# Altium PCB main.PcbDoc (part 13 of 16)
Units mil, origin at the board's own origin, x right, y up, seen from the top; angles counter-clockwise.
Board outline 8394.75 x 5164.44 mil, 7 copper layers (Top Layer 1, Layer 2, Layer 3, Unused, Layer 4_pow, Layer 5_gnd, Bottom 6+gnd), stack 64.043 mil thick; 364 components, 409 nets, 1932 pads, 1061 vias.
Unrouted connection lines stored in the file: 2.
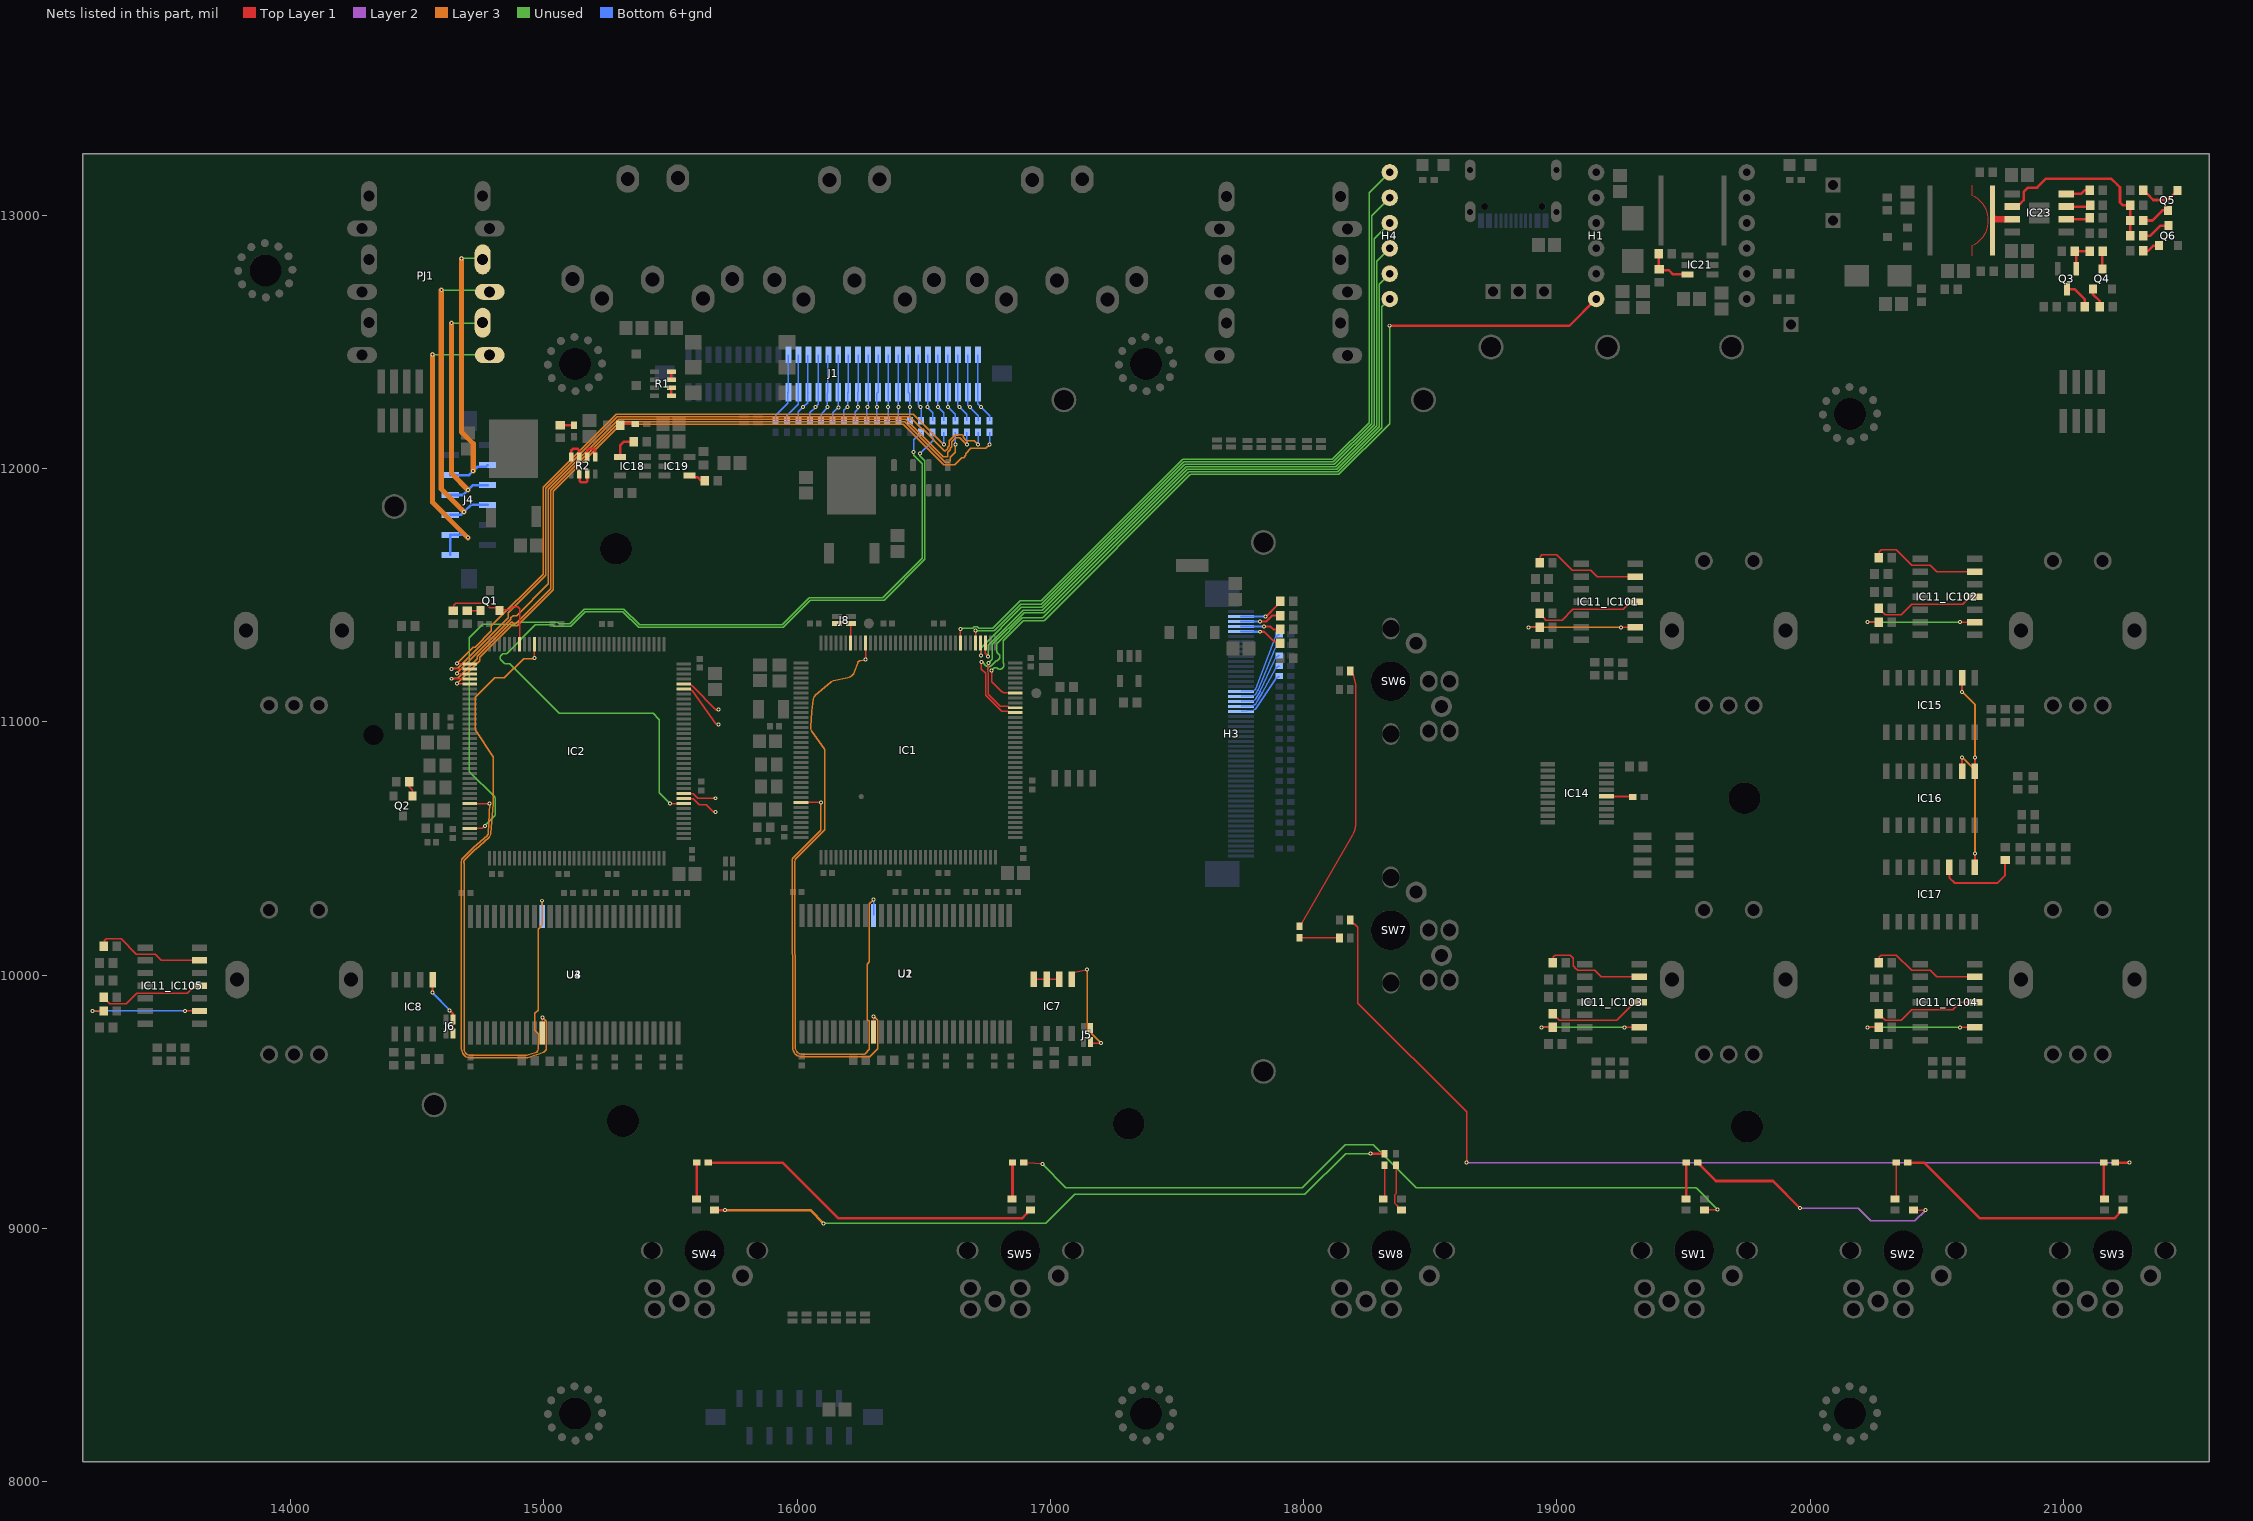
[diagram p16: the nets of this part, all layers, seen from the top]

## Via types
v1: diameter 15.75, hole 7.87, Top Layer 1 to Bottom 6+gnd, tented both sides, 961 vias
v2: diameter 27.56, hole 11.81, Top Layer 1 to Bottom 6+gnd, 45 vias
v3: diameter 23.62/23.62/23.62/23.62/23.62/23.62/23.62 (per signal layer), hole 12, Top Layer 1 to Bottom 6+gnd, tented top, 42 vias
v4: diameter 15.75, hole 7.87, Top Layer 1 to Bottom 6+gnd, 10 vias
v5: diameter 23.62/23.62/23.62/23.62/23.62/23.62/23.62 (per signal layer), hole 12, Top Layer 1 to Bottom 6+gnd, tented bottom, 3 vias

## Nets (pads, with @x,y where several pads share a name; then routed paths per layer and width w, separated by ;. In a path a pad name is that pad's centre, name@x,y a point inside that pad or via, vN(x,y) a via of type N, cw(c..) or ccw(c..) an arc to the next point about the centre after c; other vN are vias at no path point) (continued)
NetH3_30: H3.30 R67.1 | length 219.2
  Bottom 6+gnd w5: H3.30@17753.15,11041.93 17801.83,11045.34 17808.28,11049.33 ccw(c17804.33,11055.71) 17810.56,11051.53 17890.89,11171.3 R67.1@17903.15,11180.61
NetH3_31: H3.31 R68.1 | length 237.6
  Bottom 6+gnd w5: H3.31@17753.15,11061.61 17801.83,11065.02 17808.28,11069.02 ccw(c17804.33,11075.4) 17810.79,11071.59 17819.4,11086.19 17836.63,11115.4 ccw(c17804.33,11134.45) 17837.05,11116.12 17890.89,11212.61 R68.1@17903.15,11221.92
NetH3_32: H3.32 R69.1 | length 256.9
  Bottom 6+gnd w5: H3.32@17753.15,11081.3 17801.83,11084.71 17808.28,11088.7 ccw(c17804.33,11095.08) 17810.79,11091.27 17828.02,11120.48 ccw(c17804.33,11134.45) 17829.33,11122.98 17881.57,11236.86 cw(c17888.39,11233.74) 17881.81,11237.34 17890.89,11253.93 R69.1@17903.15,11263.24
NetH3_33: H3.33 R70.1 | length 276.6
  Bottom 6+gnd w5: H3.33@17753.15,11100.98 17801.83,11104.39 17808.28,11108.39 ccw(c17804.33,11114.77) 17810.79,11110.96 17819.4,11125.56 ccw(c17804.33,11134.45) 17820.55,11127.87 17881.44,11277.87 cw(c17888.39,11275.05) 17881.81,11278.65 17890.89,11295.25 R70.1@17903.15,11304.56
NetH3_34: H3.34 R71.1 | length 296.5
  Bottom 6+gnd w5: H3.34@17753.15,11120.67 17801.83,11124.08 17808.28,11128.07 ccw(c17804.33,11134.45) 17811.36,11131.82 17881.36,11319 cw(c17888.39,11316.37) 17881.81,11319.97 17890.89,11336.56 R71.1@17903.15,11345.87
NetH3_46: H3.46 R42.1 | length 174.4
  Top Layer 1 w8: v1(17827.99,11356.23) 17844.32,11356.23 17883.57,11316.98 17901.9,11316.98 R42.1@17908.57,11310.32
  Bottom 6+gnd w8: H3.46@17753.15,11356.89 17800.33,11356.23 v1(17827.99,11356.23)
NetH3_47: H3.47 R43.1 | length 160.7
  Top Layer 1 w8: v1(17844.02,11376.39) 17844.61,11376.98 17868.57,11376.98 17880.23,11365.32 R43.1@17908.57,11365.32
  Bottom 6+gnd w8: H3.47@17753.15,11376.57 17753.35,11376.78 17843.62,11376.78 v1(17844.02,11376.39)
NetH3_48: H3.48 R44.1 | length 165.4
  Top Layer 1 w8: v1(17828.57,11396.98) 17853.57,11396.98 17876.9,11420.32 R44.1@17908.57,11420.32
  Bottom 6+gnd w8: H3.48@17753.15,11396.26 17827.84,11396.26 v1(17828.57,11396.98)
NetH3_49: H3.49 R45.1 | length 182.9
  Top Layer 1 w8: v1(17848.57,11416.98) 17850.05,11418.47 17853.79,11418.47 17895.84,11460.51 17895.84,11464.25 R45.1@17908.57,11476.98
  Bottom 6+gnd w8: H3.49@17753.15,11415.94 17753.67,11416.46 17848.05,11416.46 v1(17848.57,11416.98)
NetIC1_138: IC1.138 J8.1 J8.3 | length 132.9
  Top Layer 1 w5: J8.3@16158.03,11388.82 J8.1@16213.15,11388.82 16211.77,11387.44 IC1.138@16211.77,11311.57
NetIC2_81: IC2.81 TP4.1 | length 147.8
  Top Layer 1 w5: IC2.81@15552.67,10697.62 15589.35,10697.62 15613.72,10673.24 15642.26,10673.24 15671.69,10643.82 v1(15678.15,10643.82)
NetIC2_82: IC2.82 TP3.1 | length 133.1
  Top Layer 1 w5: IC2.82@15552.67,10717.31 15589.66,10717.31 15608.15,10698.82 v1(15678.15,10698.82)
NetIC2_103: IC2.103 TP6.1 | length 206.6
  Top Layer 1 w5: IC2.103@15552.67,11130.69 15579.2,11127.29 15585.65,11123.29 cw(c15581.7,11116.91) 15587.82,11121.25 15678.15,10993.82 v1(15690.46,10989.49)
NetIC2_104: IC2.104 TP5.1 | length 178.7
  Top Layer 1 w5: IC2.104@15552.67,11150.38 15579.2,11146.97 15585.65,11142.97 cw(c15581.7,11136.6) 15587.06,11141.85 15678.15,11048.82 v1(15690.46,11048.51)
NetIC2_138: IC2.138 Q1.2 R109.1 | length 448.8
  Top Layer 1 w5: R109.1@14643.15,11438.82 14644.45,11440.12 14644.45,11460.12 14653.15,11468.82 14769.23,11468.82 14786.79,11451.26 14813.74,11451.26 Q1.2@14825.55,11439.45 14829.92,11443.82 14865.17,11443.82 14876.73,11455.37 14896.37,11455.37 14905.58,11446.17 14905.58,11309.43 IC2.138@14903.53,11307.38
NetIC7_1: IC7.1 J5.2 J5.4 | length 486.4
  Top Layer 1 w5: IC7.1@17085.24,9983.98 17095.53,10011.5 v1(17145.24,10022.2) ; J5.4@17157.8,9737.09 J5.2@17157.8,9792.2 ; J5.4@17164.02,9737.2 17169.02,9732.2 v1(17200.24,9732.2)
  Layer 3 w5: v1(17145.24,10022.2) 17145.24,9787.2 v1(17200.24,9732.2)
NetIC7_2: IC7.2 IC7.3 IC7.4 | length 100
  Top Layer 1 w5: IC7.4@16935.24,9983.98 IC7.2@17035.24,9983.98
NetIC8_1: IC8.1 J6.2 J6.4 | length 245.9
  Top Layer 1 w8: v1(14560.48,9931.26) 14560.48,9981.03 IC8.1@14561.48,9982.03 ; v1(14628.48,9861.26) 14641.48,9848.26 J6.2@14641.48,9825.26 J6.4@14641.48,9770.14
  Bottom 6+gnd w8: v1(14560.48,9931.26) 14560.48,9930.26 14628.48,9862.26 v1(14628.48,9861.26)
NetIC14_15: IC14.15 R76.2 | length 105.2
  Top Layer 1 w8: IC14.15@19195.67,10706.02 19196.77,10704.92 19298.9,10704.92 R76.2@19300,10703.82
NetIC15_10: IC15.10 IC16.9 | length 388.4
  Top Layer 1 w8: v1(20600,11119.25) IC15.10@20600,11173.82 ; IC16.9@20650,10806.1 v1(20650,10860.67)
  Layer 3 w8: v1(20600,11119.25) 20650,11069.25 v1(20650,10860.67)
NetIC16_10: IC16.10 IC17.9 | length 509.8
  Top Layer 1 w8: IC16.10@20600,10806.1 v1(20600,10860.67) ; IC17.9@20650,10426.1 v1(20650,10480.67)
  Layer 3 w8: v1(20600,10860.67) 20650,10810.67 v1(20650,10480.67)
NetIC17_11: IC17.11 R86.1 | length 341.8
  Top Layer 1 w8: IC17.11@20550,10426.1 20550,10385 20570,10365 20740,10365 20770,10395 R86.1@20770,10455
NetIC18_4: IC18.4 R102.1 | length 105
  Top Layer 1 w10: IC18.4@15301.2,12047.11 15301.2,12092.11 15316.2,12107.11 R102.1@15355.02,12107.11
NetIC19_4: IC19.4 R105.1 | length 69.9
  Top Layer 1 w10: IC19.4@15574.63,11972.31 15579.94,11966.99 15605.96,11966.99 15618.58,11954.37 15634.13,11954.37 R105.1@15636.2,11952.31
NetIC21_3: IC21.3 R17.1 R20.2 | length 182.3
  Top Layer 1 w10: R20.2@19402.28,12848.61 19402.28,12789.93 19407.8,12784.4 19441.75,12784.4 19459.15,12767 IC21.3@19516.38,12767
NetIC23_2: IC23.2 R52.1 | length 95.3
  Top Layer 1 w10: IC23.2@21011.42,12985 21099.65,12985 R52.1@21104.65,12990
NetIC23_3: IC23.3 R127.1 | length 95.3
  Top Layer 1 w10: IC23.3@21011.42,13035 21099.65,13035 R127.1@21104.65,13040
NetIC23_4: IC23.4 R128.2 | length 99.4
  Top Layer 1 w10: IC23.4@21011.42,13085 21069.65,13085 21084.65,13100 R128.2@21104.65,13100
NetIC23_6: IC23.6 R129.2 R130.2 R131.2 | length 729.6
  Top Layer 1 w10: IC23.6@20797.87,13035 20806.65,13043.78 20826.64,13043.78 20842.89,13060.03 20842.89,13093.25 20859.65,13110 20895.7,13110 20930.07,13144.38 21189.57,13144.38 21212.72,13121.22 21212.85,13121.22 21223.43,13110.65 21223.43,13051.22 21234.65,13040 R129.2@21264.65,13040 R130.2@21264.65,12980 R131.2@21264.65,12920
NetIC23_7: IC23.7 L2.1 | length 75.3
  Top Layer 1 w25: L2.1@20724.65,12990 20729.65,12985 IC23.7@20797.87,12985
NetJ1_1: J1.1 J1.2 R141.2 | length 279.2
  Bottom 6+gnd w5: J1.2@16713.7,12450 J1.1@16713.7,12302.36 16713.7,12256.3 v1(16726.81,12243.19) 16760,12210 R141.2@16760,12190
NetJ1_3: J1.3 J1.4 R142.2 | length 276.8
  Bottom 6+gnd w5: J1.4@16674.33,12450 J1.3@16674.33,12302.36 16674.33,12250.67 v1(16681.81,12243.19) 16715,12210 R142.2@16715,12190
NetJ1_5: J1.5 J1.6 R143.2 | length 274.5
  Bottom 6+gnd w5: J1.6@16634.96,12450 J1.5@16634.96,12302.36 16634.96,12250.04 v1(16641.81,12243.19) 16670,12215 R143.2@16670,12190
NetJ1_7: J1.7 J1.8 R144.2 | length 272.2
  Bottom 6+gnd w5: J1.8@16595.59,12450 J1.7@16595.59,12302.36 v1(16595.59,12244.41) 16625,12215 R144.2@16625,12190
NetJ1_9: J1.9 J1.10 R145.2 | length 269.8
  Bottom 6+gnd w5: J1.10@16556.22,12450 J1.9@16556.22,12302.36 v1(16556.22,12243.78) 16580,12220 R145.2@16580,12190
NetJ1_11: J1.11 J1.12 R146.2 | length 269.1
  Bottom 6+gnd w5: J1.12@16516.85,12450 J1.11@16516.85,12302.36 16515,12300.51 v1(16515,12243.19) 16515,12240 16535,12220 R146.2@16535,12190
NetJ1_13: J1.13 J1.14 R147.2 | length 265.2
  Bottom 6+gnd w5: J1.14@16477.48,12450 J1.13@16477.48,12302.36 16477.48,12252.52 v1(16486.81,12243.19) 16490,12240 R147.2@16490,12190
NetJ1_15: J1.15 J1.16 R148.2 | length 262.9
  Bottom 6+gnd w5: J1.16@16438.11,12450 J1.15@16438.11,12302.36 16445,12295.47 v1(16445,12243.19) R148.2@16445,12190
NetJ1_17: J1.17 J1.18 R149.2 | length 260.5
  Bottom 6+gnd w5: J1.18@16398.74,12450 J1.17@16398.74,12302.36 16400,12301.1 v1(16400,12243.19) R149.2@16400,12190
NetJ1_19: J1.19 J1.20 R150.2 | length 261.8
  Bottom 6+gnd w5: R150.2@16355,12190 16359.37,12194.37 v1(16359.37,12243.19) J1.19@16359.37,12302.36 J1.20@16359.37,12450
NetJ1_21: J1.21 J1.22 R151.2 | length 262.1
  Bottom 6+gnd w5: R151.2@16315,12190 v1(16315,12243.19) 16315,12297.36 J1.21@16320,12302.36 J1.22@16320,12450
NetJ1_23: J1.23 J1.24 R152.2 | length 262.3
  Bottom 6+gnd w5: R152.2@16275,12190 16275,12240 v1(16278.19,12243.19) 16280,12245 16280,12301.73 J1.23@16280.63,12302.36 J1.24@16280.63,12450
NetJ1_25: J1.25 J1.26 R153.2 | length 264.7
  Bottom 6+gnd w5: R153.2@16230,12190 16230,12225 16240,12235 v1(16240,12243.19) 16240,12301.1 J1.25@16241.26,12302.36 J1.26@16241.26,12450
NetJ1_27: J1.27 J1.28 R154.2 | length 267
  Bottom 6+gnd w5: R154.2@16185,12190 16185,12230 v1(16198.19,12243.19) 16200,12245 16200,12300.47 J1.27@16201.89,12302.36 J1.28@16201.89,12450
NetJ1_29: J1.29 J1.30 R155.2 | length 269.3
  Bottom 6+gnd w5: R155.2@16140,12190 16140,12220 v1(16162.52,12242.52) J1.29@16162.52,12302.36 J1.30@16162.52,12450
NetJ1_31: J1.31@16123.15,12302.36 J1.32@16123.15,12450 R156.2 | length 271.7
  Bottom 6+gnd w5: R156.2@16095,12190 16095,12215 16120,12240 v1(16120,12243.19) 16120,12299.21 J1.31@16123.15,12302.36 ; J1.31@16121.57,12300.79 J1.32@16121.57,12448.43
NetJ1_33: J1.33 J1.34 R157.2 | length 274
  Bottom 6+gnd w5: R157.2@16050,12190 16050,12220 v1(16073.19,12243.19) 16083.78,12253.78 J1.33@16083.78,12302.36 J1.34@16083.78,12450
NetJ1_35: J1.35 J1.36 R158.2 | length 276.3
  Bottom 6+gnd w5: R158.2@16005,12190 16005,12225 v1(16023.19,12243.19) 16041.37,12261.37 16041.37,12299.33 J1.35@16044.41,12302.36 ; J1.35@16042.89,12300.84 J1.36@16042.89,12448.48
NetJ1_37: J1.37 J1.38 R159.2 | length 278.7
  Bottom 6+gnd w5: R159.2@15960,12190 15960,12210 16005.04,12255.04 J1.37@16005.04,12302.36 J1.38@16005.04,12450
NetJ1_39: J1.39 J1.40 R160.2 | length 281
  Bottom 6+gnd w5: R160.2@15915,12190 15915,12210.53 15963.4,12258.93 15963.4,12300.09 J1.39@15965.67,12302.36 J1.40@15965.67,12450
NetQ1_1: Q1.1 R106.2 | length 52.9
  Top Layer 1 w5: R106.2@14698.15,11438.82 14750.12,11438.82 Q1.1@14750.75,11439.45
NetQ2_1: Q2.1 R107.2 | length 66.7
  Top Layer 1 w5: R107.2@14465.79,10768.82 14465.79,10746.18 14480.55,10731.42 Q2.1@14480.55,10708.19
NetQ3_1: Q3.1 R21.1 R38.2 | length 132.5
  Top Layer 1 w10: Q3.1@21050.02,12789.37 21050.02,12853.37 R21.1@21044.02,12859.37 R38.2@21104.02,12859.37
NetQ3_3: Q3.3 R39.2 | length 116.6
  Top Layer 1 w10: Q3.3@21014.02,12709.37 21044.02,12709.37 21084.02,12669.37 R39.2@21084.02,12639.37
NetQ4_1: Q4.1 R50.1 | length 82
  Top Layer 1 w10: Q4.1@21116.61,12710 21116.61,12688.55 21144.02,12661.15 R50.1@21144.02,12639.37
NetQ4_3: Q4.3 R38.1 | length 71.1
  Top Layer 1 w10: Q4.3@21154.02,12788.74 21154.02,12858.19 R38.1@21155.2,12859.37
NetQ5_1: Q5.1 R133.2 | length 170.3
  Top Layer 1 w10: R133.2@21315.83,13100 21315.83,13098.03 21327.56,13086.3 21329.3,13086.3 21354.63,13060.97 21414.27,13060.97 21439.33,13086.02 21441.3,13086.02 21452.05,13096.77 Q5.1@21452.05,13098.74
NetQ5_3: Q5.3 R130.1 | length 115.4
  Top Layer 1 w10: R130.1@21315.83,12980 21350.97,12980 21390.97,13020 Q5.3@21414.65,13020
NetQ6_1: Q6.1 R134.2 | length 71.4
  Top Layer 1 w10: R134.2@21314.65,12860 21334.65,12860 21355.91,12881.26 Q6.1@21377.24,12881.26
NetQ6_3: Q6.3 R131.1 | length 115.4
  Top Layer 1 w10: R131.1@21315.83,12920 21343.71,12920 21383.71,12960 Q6.3@21414.65,12960
NetR1_1: R1.1 R1.2 | length 31.5
  Top Layer 1 w10: R1.1@15503.46,12287.76 R1.2@15503.46,12319.25
NetR1_3: R1.3 R1.4 | length 31.5
  Top Layer 1 w10: R1.3@15503.46,12350.75 R1.4@15503.46,12382.24
NetR2_2: R2.2 R2.3 | length 89.9
  Top Layer 1 w10: R2.2@15140.45,11978.65 15141.2,11977.9 15141.2,11951.64 15147.06,11945.78 15166.09,11945.78 15171.95,11951.64 R2.3@15171.95,11978.65
NetR2_5: R2.5 R2.6 | length 89.9
  Top Layer 1 w10: R2.6@15171.95,12045.57 15171.95,12072.58 15177.81,12078.44 15196.84,12078.44 15202.7,12072.58 15202.7,12046.32 R2.5@15203.45,12045.57
NetR2_7: R2.7 R2.8 | length 89.9
  Top Layer 1 w10: R2.8@15108.96,12045.57 15108.96,12072.58 15114.82,12078.44 15133.85,12078.44 15139.71,12072.58 15139.71,12046.32 R2.7@15140.45,12045.57
NetR3_1: R3.1 SW8.3 | length 191.2
  Top Layer 1 w6: R3.1@18365,9250 18365,9138.2 18360.7,9133.9 18360.7,9099.22 18371.7,9088.22 18371.7,9084.28 18382.48,9073.5 SW8.3@18386.42,9073.5
NetR4_1: R4.1 SW5.3 | length 1380.1
  Top Layer 1 w10: R4.1@15648.42,9260 15943.15,9260 16163.15,9040 16887.67,9040 16905.96,9058.28 16905.96,9062.22 16917.24,9073.5 SW5.3@16921.17,9073.5
NetR4_2: R4.2 SW4.1 | length 143.5
  Top Layer 1 w10: SW4.1@15602.44,9116.81 15603.15,9117.52 R4.2@15603.15,9260
NetR8_1: R8.1 SW4.3 | length 2800
  Top Layer 1 w5: SW4.3@15659.28,9062.09 15659.28,9062.22 15669.59,9072.54 SW4.3@15675.46,9072.54
  Top Layer 1 w10: SW4.3@15675.46,9072.54 v1(15715,9072.54) ; v1(18265,9295.28) R8.1@18320,9295.28
  Unused w5: v1(16105,9020) 16977.93,9020 ccw(c16977.93,9025) 16981.45,9021.45 17093.55,9133.55 cw(c17097.07,9130) 17097.07,9135 18002.93,9135 ccw(c18002.93,9140) 18006.45,9136.45 18163.83,9293.83 cw(c18167.35,9290.28) 18167.35,9295.28 v1(18265,9295.28)
  Layer 3 w10: v1(15715,9072.54) 16052.46,9072.54 v1(16105,9020)
NetR8_2: R8.2 SW8.1 | length 135.5
  Top Layer 1 w5: SW8.1@18314.37,9116.81 18320,9122.44 R8.2@18320,9250
NetR72_1: R72.1 SW1.3 | length 3006.8
  Top Layer 1 w5: R72.1@16895.79,9260 16908.05,9259.15 v1(16968.15,9255) ; SW1.3@19582.58,9073.5 19597.79,9073.94 v1(19635,9075)
  Unused w5: v1(16968.15,9255) 17061.7,9161.45 ccw(c17065.22,9165) 17065.22,9160 17995,9160 18165,9330 18275,9330 18445,9160 19547.93,9160 cw(c19547.93,9155) 19551.46,9158.54 v1(19635,9075)
NetR72_2: R72.2 SW5.1 | length 143.8
  Top Layer 1 w10: SW5.1@16849.12,9116.81 16850.51,9118.2 R72.2@16850.51,9260
NetR73_1: R73.1 SW2.3 | length 1064
  Top Layer 1 w5: SW2.3@20407.69,9073.5 20408.16,9073.03 v1(20455.95,9073.03)
  Top Layer 1 w10: R73.1@19555.28,9260 19558.23,9260 19565.04,9253.19 19565.04,9250.24 19627.78,9187.5 19852.5,9187.5 v1(19960,9080)
  Layer 2 w5: v1(19960,9080) 20190,9080 20240,9030 20412.92,9030 v1(20455.95,9073.03)
NetR73_2: R73.2 SW1.1 | length 143.4
  Top Layer 1 w10: R73.2@19510,9260 19510,9117.34 SW1.1@19510.53,9116.81
NetR74_1: R74.1 SW3.3 | length 956.5
  Top Layer 1 w10: R74.1@20385.28,9260 20450,9260 20670,9040 21200.96,9040 21219.24,9058.28 21219.24,9062.22 21230.52,9073.5 SW3.3@21234.46,9073.5
NetR74_2: R74.2 SW2.1 | length 145
  Top Layer 1 w5: SW2.1@20335.64,9116.81 20340,9121.17 R74.2@20340,9260
NetR75_1: R75.1 SW7.3 | length 3822.2
  Top Layer 1 w5: SW7.3@18184.11,10218.18 18184.11,10214.24 18195.39,10202.97 18199.32,10202.97 18213.15,10189.14 18213.15,9890 18643.15,9460 v1(18643.15,9260)
  Top Layer 1 w10: R75.1@21205.28,9260 v1(21260,9260)
  Layer 2 w5: v1(18643.15,9260) v1(21260,9260)
NetR75_2: R75.2 SW3.1 | length 144.2
  Top Layer 1 w10: R75.2@21160,9260 21160,9119.22 SW3.1@21162.41,9116.81
NetR77_1: R77.1 SW6.3 | length 1072
  Top Layer 1 w5: R77.1@17983.15,10192.64 17992.46,10204.9 18193.23,10554.69 ccw(c18110.55,10602.23) 18205.92,10602.32 18205.39,11146.45 ccw(c18197.89,11146.44) 18205.14,11148.34 18195.39,11185.56 SW6.3@18184.11,11200.77
NetR77_2: R77.2 SW7.1 | length 158.2
  Top Layer 1 w5: R77.2@17983.15,10147.36 18139.57,10147.36 SW7.1@18140.8,10146.13
NetR103_2: R103.2 R104.1 | length 61.8
  Top Layer 1 w10: R103.2@15301.2,12172.11 15306.2,12177.11 R104.1@15360.93,12177.11
NetR139_2: R139.2 R140.1 | length 55.3
  Top Layer 1 w10: R139.2@15065,12172.48 15065.67,12171.81 R140.1@15120,12171.81
O\0\_IC101: IC11_IC101.2 R48_IC101.1 | length 466.1
  Top Layer 1 w5: v4(18887.72,11373.82) R48_IC101.1@18931.53,11373.82 ; v4(19252.72,11373.82) IC11_IC101.2@19310,11373.82
  Layer 3 w5: v4(18887.72,11373.82) v4(19252.72,11373.82)
O\0\_IC102: IC11_IC102.2 R48_IC102.1 | length 466.1
  Top Layer 1 w5: v4(20227.28,11393.82) R48_IC102.1@20271.1,11393.82 ; v4(20592.28,11393.82) IC11_IC102.2@20649.57,11393.82
  Unused w5: v4(20227.28,11393.82) v4(20592.28,11393.82)
O\0\_IC103: IC11_IC103.2 R48_IC103.1 | length 428.8
  Top Layer 1 w5: v4(18940,9793.82) R48_IC103.1@18983.82,9793.82 ; v4(19267.72,9793.82) IC11_IC103.2@19325,9793.82
  Unused w5: v4(18940,9793.82) v4(19267.72,9793.82)
O\0\_IC104: IC11_IC104.2 R48_IC104.1 | length 466.1
  Top Layer 1 w5: v4(20227.28,9793.82) R48_IC104.1@20271.1,9793.82 ; v4(20592.28,9793.82) IC11_IC104.2@20649.57,9793.82
  Unused w5: v4(20227.28,9793.82) v4(20592.28,9793.82)
O\0\_IC105: IC11_IC105.2 R48_IC105.1 | length 466.1
  Top Layer 1 w5: v4(13218.15,9858.82) R48_IC105.1@13261.97,9858.82 ; v4(13583.15,9858.82) IC11_IC105.2@13640.43,9858.82
  Bottom 6+gnd w5: v4(13218.15,9858.82) v4(13583.15,9858.82)
O\1\_IC101: IC11_IC101.4 R47_IC101.1 | length 420
  Top Layer 1 w5: R47_IC101.1@18931.53,11428.82 18931.53,11426.85 18945.77,11412.62 18946.52,11412.62 18956.52,11402.62 19020.32,11402.62 19061.81,11444.11 19262.58,11444.11 19292.28,11473.82 IC11_IC101.4@19310,11473.82
O\1\_IC102: IC11_IC102.4 R47_IC102.1 | length 420
  Top Layer 1 w5: R47_IC102.1@20271.1,11448.82 20271.1,11446.85 20285.33,11432.62 20286.09,11432.62 20296.09,11422.62 20359.89,11422.62 20401.38,11464.11 20602.15,11464.11 20631.85,11493.82 IC11_IC102.4@20649.57,11493.82
O\1\_IC103: IC11_IC103.4 R47_IC103.1 | length 382.7
  Top Layer 1 w5: R47_IC103.1@18983.82,9848.82 18983.82,9846.85 18998.05,9832.62 18998.8,9832.62 19008.8,9822.62 19236.08,9822.62 19307.28,9893.82 IC11_IC103.4@19325,9893.82
O\1\_IC104: IC11_IC104.4 R47_IC104.1 | length 420
  Top Layer 1 w5: R47_IC104.1@20271.1,9848.82 20271.1,9846.85 20285.33,9832.62 20286.09,9832.62 20296.09,9822.62 20359.89,9822.62 20401.38,9864.11 20562.58,9864.11 20592.28,9893.82 IC11_IC104.4@20649.57,9893.82
O\1\_IC105: IC11_IC105.4 R47_IC105.1 | length 420
  Top Layer 1 w5: R47_IC105.1@13261.97,9913.82 13261.97,9911.85 13276.2,9897.62 13276.95,9897.62 13286.95,9887.62 13350.75,9887.62 13392.25,9929.11 13593.01,9929.11 13622.72,9958.82 IC11_IC105.4@13640.43,9958.82
O\2\_IC101: IC11_IC101.6 R49_IC101.1 | length 439.3
  Top Layer 1 w5: R49_IC101.1@18931.53,11628.82 18933.56,11630.84 18933.56,11652.09 18941.15,11659.68 19000.28,11659.68 19061.14,11598.82 19134.48,11598.82 19159.48,11573.82 IC11_IC101.6@19310,11573.82
O\2\_IC102: IC11_IC102.6 R49_IC102.1 | length 439.3
  Top Layer 1 w5: R49_IC102.1@20271.1,11648.82 20273.13,11650.84 20273.13,11672.09 20280.72,11679.68 20339.85,11679.68 20400.71,11618.82 20474.05,11618.82 20499.05,11593.82 IC11_IC102.6@20649.57,11593.82
O\2\_IC103: IC11_IC103.6 R49_IC103.1 | length 420.7
  Top Layer 1 w5: R49_IC103.1@18983.82,10048.82 18985.84,10050.84 18985.84,10072.09 18993.43,10079.68 19052.56,10079.68 19065,10067.25 19065,10036.75 19070.91,10030.84 19070.91,10029.43 19081.52,10018.82 19149.48,10018.82 19174.48,9993.82 IC11_IC103.6@19325,9993.82
O\2\_IC104: IC11_IC104.6 R49_IC104.1 | length 439.3
  Top Layer 1 w5: R49_IC104.1@20271.1,10048.82 20273.13,10050.84 20273.13,10072.09 20280.72,10079.68 20339.85,10079.68 20400.71,10018.82 20474.05,10018.82 20499.05,9993.82 IC11_IC104.6@20649.57,9993.82
O\2\_IC105: IC11_IC105.6 R49_IC105.1 | length 439.3
  Top Layer 1 w5: R49_IC105.1@13261.97,10113.82 13263.99,10115.84 13263.99,10137.09 13271.58,10144.68 13330.71,10144.68 13391.58,10083.82 13464.91,10083.82 13489.91,10058.82 IC11_IC105.6@13640.43,10058.82
PH_LOUT1_11: J4.1 J4.3 PJ1.26 | length 1160.5
  Unused w5: v1(14560,12450) 14782.76,12450 cw(c14782.76,12445) PJ1.26@14786.24,12448.59
  Layer 3 w20: v1(14560,12450) 14560,11867.48 v1(14700,11727.48)
  Bottom 6+gnd w10: J4.1@14630,11660 J4.3@14630,11738.74 14688.74,11738.74 v1(14700,11727.48)
PH_LOUT2_11: J4.7 J4.8 PJ1.6 | length 974.4
  Unused w5: v1(14635,12575) 14755.11,12575 ccw(c14755.11,12580) PJ1.6@14758.68,12576.5
  Layer 3 w20: v1(14635,12575) 14635,11981.81 v1(14700.91,11915.91)
  Bottom 6+gnd w10: J4.7@14630,11896.22 14681.22,11896.22 v1(14700.91,11915.91) 14720.59,11935.59 J4.8@14777.64,11935.59
PH_ROUT1_11: J4.5 J4.6 PJ1.24 | length 1269.9
  Unused w5: v1(14595,12705) 14777.76,12705 cw(c14777.76,12700) 14781.29,12703.54 PJ1.24@14786.24,12698.59
  Layer 3 w20: v1(14595,12705) 14595,11920 v1(14685,11830)
  Bottom 6+gnd w10: J4.5@14630,11817.48 14631.11,11818.59 14673.59,11818.59 v1(14685,11830) 14711.85,11856.85 J4.6@14777.64,11856.85
PH_ROUT2_11: J4.9 J4.10 PJ1.4 | length 1106.8
  Unused w5: v1(14675,12830) 14753.11,12830 cw(c14753.11,12825) 14756.65,12828.54 PJ1.4@14758.68,12826.5
  Layer 3 w20: v1(14675,12830) 14675,12145 14721.24,12098.76 v1(14721.24,11991.24)
  Bottom 6+gnd w10: J4.9@14630,11974.96 14704.96,11974.96 v1(14721.24,11991.24) 14737.52,12007.52 14770.83,12007.52 J4.10@14777.64,12014.33
SAI1_FS: IC2.3 R143.1 | length 2880.9
  Top Layer 1 w5: v1(14656.48,11190.89) 14657.05,11190.32 14706.58,11190.32 IC2.3@14707.15,11189.75
  Layer 3 w5: v1(14656.48,11190.89) 14656.48,11193.19 14813.26,11349.97 ; 14813.83,11350.54 14869.63,11406.34 14869.63,11411.37 14878.63,11420.37 14892.12,11420.37 15017.83,11546.08 15017.83,11918.63 15294.97,12195.77 16429.23,12195.77 16577.52,12047.48 16593.86,12047.48 16593.86,12064.16 16605,12075.3 16605,12080.86 16610,12085.86 16610,12105.86 16626.5,12122.36 16642.5,12122.36 16669.86,12095 v1(16670,12095)
  Bottom 6+gnd w5: v1(16670,12095) R143.1@16670,12144.72
SAI1_MCLK: IC2.1 R145.1 | length 2695.2
  Top Layer 1 w5: v1(14656.48,11230.26) 14657.05,11229.69 14706.58,11229.69 IC2.1@14707.15,11229.12
  Layer 3 w5: v1(14656.48,11230.26) 14722.08,11295.85 14729.72,11295.85 14793.26,11359.39 14793.26,11379.14 14997.83,11583.71 14997.83,11926.92 15286.68,12215.77 16459.23,12215.77 v1(16580,12095)
  Bottom 6+gnd w5: v1(16580,12095) R145.1@16580,12144.72
SAI1_SCK: IC2.4 R144.1 | length 2892.8
  Top Layer 1 w5: v1(14634.67,11170.65) 14634.96,11170.35 14706.86,11170.35 IC2.4@14707.15,11170.06
  Layer 3 w5: v1(14634.67,11170.65) 14636.73,11172.71 14660.04,11172.71 14736.63,11249.29 14736.63,11259.2 14823.26,11345.83 ; 14823.83,11346.4 14872.84,11395.41 14878.63,11389.63 14891.37,11389.63 15027.83,11526.08 15027.83,11914.49 15299.11,12185.77 16424.23,12185.77 16584.4,12025.6 16602.07,12025.6 16605,12028.53 16605,12045 16625.37,12065.37 v1@16625.37,12094.63
  Bottom 6+gnd w5: R144.1@16625,12144.72 16625,12095.37 v1(16625.37,12095)
SAI1_SD_A: IC2.5 R141.1 | length 2968.3
  Top Layer 1 w5: v1(14656.48,11151.52) 14657.05,11150.95 14706.58,11150.95 IC2.5@14707.15,11150.38
  Layer 3 w5: v1(14656.48,11151.52) 14746.63,11241.66 14746.63,11255.05 14833.26,11341.69 ; 14833.83,11342.26 14872.84,11381.27 14874.49,11379.63 14895.51,11379.63 15037.83,11521.94 15037.83,11910.35 15303.25,12175.77 16419.83,12175.77 16580,12015.6 16622.17,12015.6 16649.98,12043.41 16657.58,12043.41 16666.59,12052.42 16666.59,12060.02 16686.57,12080 16745,12080 v1(16760,12095)
  Bottom 6+gnd w5: v1(16760,12095) R141.1@16760,12144.72
SAI1_SD_B: IC2.2 R142.1 | length 2947.9
  Top Layer 1 w5: v1(14634.67,11210.02) 14634.96,11209.72 14706.86,11209.72 IC2.2@14707.15,11209.43
  Layer 3 w5: v1(14634.67,11210.02) 14636.73,11212.08 14660.08,11212.08 14803.26,11355.25 14859.63,11411.62 14859.63,11431.37 15007.83,11579.57 15007.83,11922.78 15290.82,12205.77 16444.23,12205.77 16495,12155 16497.16,12155 16583.86,12068.3 16595,12079.44 16595,12085 16600,12090 16600,12110 16624.65,12134.65 16652.42,12134.65 16655.35,12131.72 16655.35,12123.65 16668.63,12110.37 16699.63,12110.37 16714.63,12095.37 v1(16715,12095.37)
  Bottom 6+gnd w5: v1(16715,12095.37) R142.1@16715,12144.72
SAI2_SD_A: IC2.80 R146.1 | length 3558.7
  Top Layer 1 w5: v1(15498.15,10678.82) 15499.03,10677.94 IC2.80@15552.67,10677.94
  Unused w5: v1(15498.15,10678.82) 15456.45,10720.52 cw(c15460,10724.04) 15455,10724.04 15455,11007.93 ccw(c15450,11007.93) 15453.55,11011.45 15431.45,11033.55 ccw(c15427.93,11030) 15427.93,11035 15062.07,11035 cw(c15062.07,11040) 15058.55,11036.45 14865.84,11229.16 ccw(c14862.32,11225.61) 14862.32,11230.61 14847.68,11230.61 cw(c14847.68,11235.61) 14844.16,11232.06 14829.91,11246.31 cw(c14833.46,11249.83) 14828.46,11249.83 14828.46,11257.91 cw(c14833.46,11257.91) 14829.93,11261.45 14837.03,11268.55 cw(c14840.55,11265) 14840.55,11270 14851.08,11270 ccw(c14851.08,11275) 14854.6,11271.45 14966.27,11383.12 cw(c14969.79,11379.57) 14969.79,11384.57 15031.32,11384.57 cw(c15031.32,11379.57) 15034.84,11383.12 15039.34,11378.62 ccw(c15042.84,11382.19) 15042.84,11377.19 15102.41,11377.19 ccw(c15102.41,11382.19) 15105.93,11378.64 15160.84,11433.55 cw(c15164.36,11430) 15164.36,11435 15310.22,11435 cw(c15310.22,11430) 15313.74,11433.55 15372.02,11375.27 ccw(c15375.54,11378.82) 15375.54,11373.82 15944.04,11373.82 ccw(c15944.04,11378.82) 15947.56,11375.27 16050.84,11478.55 cw(c16054.36,11475) 16054.36,11480 16339.65,11480 ccw(c16339.65,11485) 16343.17,11481.45 16503.55,11641.83 ccw(c16500,11645.35) 16505,11645.35 16505,12027.73 ccw(c16500,12027.73) 16503.56,12031.25 16486.45,12048.55 cw(c16490,12052.07) 16485,12052.07 v1(16485,12060)
  Bottom 6+gnd w5: v1(16485,12060) 16535,12110 R146.1@16535,12144.72
SAI2_SD_B: IC2.34 R147.1 | length 3363.6
  Top Layer 1 w5: IC2.34@14707.15,10579.51 14756.54,10579.51 14766.85,10589.82 v1(14766.85,10590.1)
  Unused w5: v1(14766.85,10590.1) 14805.74,10628.99 ccw(c14802.19,10632.51) 14807.19,10632.51 14807.19,10700.77 ccw(c14802.19,10700.77) 14805.74,10704.29 14706.45,10803.58 cw(c14710,10807.1) 14705,10807.1 14705,11329.41 cw(c14710,11329.41) 14706.45,11332.93 14758.74,11385.22 cw(c14762.26,11381.67) 14762.26,11386.67 14886.34,11386.67 ccw(c14886.34,11391.67) 14889.86,11388.12 14894.86,11393.12 cw(c14898.38,11389.57) 14898.38,11394.57 15052.19,11394.57 cw(c15052.19,11389.57) 15055.71,11393.12 15060.2,11388.62 ccw(c15063.71,11392.19) 15063.71,11387.19 15098.27,11387.19 ccw(c15098.27,11392.19) 15101.79,11388.64 15156.7,11443.55 cw(c15160.22,11440) 15160.22,11445 15314.36,11445 cw(c15314.36,11440) 15317.88,11443.55 15376.16,11385.27 ccw(c15379.69,11388.82) 15379.69,11383.82 15939.9,11383.82 ccw(c15939.9,11388.82) 15943.42,11385.27 16046.7,11488.55 cw(c16050.22,11485) 16050.22,11490 16335.51,11490 ccw(c16335.51,11495) 16339.03,11491.45 16493.55,11645.97 ccw(c16490,11649.49) 16495,11649.49 16495,12016.06 ccw(c16490,12016.06) 16493.55,12019.58 16462.84,12050.29 cw(c16466.39,12053.82) 16461.41,12053.33 v1(16460.12,12066.62)
  Bottom 6+gnd w5: v1(16460.12,12066.62) 16460.12,12114.84 16477.74,12132.46 16480.69,12132.46 16490,12141.77 R147.1@16490,12144.72
SD_CK: H4.5 IC1.113 | length 2872
  Top Layer 1 w5: IC1.113@16703.9,11311.57 16704.57,11312.24 16704.57,11359.67 v1(16705.24,11360.34)
  Unused w5: v1(16705.24,11360.34) 16776.07,11360.34 ccw(c16776.07,11365.34) 16779.59,11361.79 16880.84,11463.05 cw(c16884.36,11459.5) 16884.36,11464.5 16962.07,11464.5 ccw(c16962.07,11469.5) 16965.59,11465.94 17525.35,12025.7 cw(c17528.87,12022.15) 17528.87,12027.15 18117.65,12027.15 18268.69,12178.19 18268.69,12998.68 H4.5@18340,13070
SD_CMD: H4.6 IC1.116 | length 3030.2
  Top Layer 1 w5: IC1.116@16644.84,11311.57 16645.04,11311.77 16645.04,11366.99 v1(16645.26,11367.21)
  Unused w5: v1(16645.26,11367.21) 16645.87,11367.82 cw(c16649.39,11364.27) 16649.27,11369.27 16691.17,11370 ccw(c16691.08,11375) 16694.6,11371.45 16697.42,11374.27 cw(c16700.94,11370.71) 16700.94,11375.71 16709.53,11375.71 cw(c16709.53,11370.71) 16713.05,11374.27 16715.53,11371.79 ccw(c16719.05,11375.34) 16719.05,11370.34 16771.42,11370.34 ccw(c16771.42,11375.34) 16774.94,11371.79 16881.14,11478 cw(c16884.67,11474.44) 16884.67,11479.44 16962.87,11479.44 ccw(c16962.87,11484.44) 16966.39,11480.89 17521.2,12035.7 cw(c17524.72,12032.15) 17524.72,12037.15 18111.44,12037.15 ccw(c18111.44,12042.15) 18114.96,12038.6 18258.69,12182.33 18258.69,13088.69 H4.6@18340,13170
SD_D0: H4.1 IC1.98 | length 2831.4
  Top Layer 1 w5: v1(16728.42,11236.65) 16727.25,11235.49 16727.25,11208.83 16744.17,11191.91 16744.17,11105.83 16807.26,11042.74 16831.5,11042.74 16837.78,11036.46 IC1.98@16860.91,11036.46
  Unused w5: v1(16728.42,11236.65) 16729.31,11236.65 cw(c16729.31,11231.65) 16732.85,11235.19 16745.33,11222.71 ccw(c16756.18,11233.59) 16750.86,11219.17 16752.6,11218.53 ccw(c16754.33,11223.22) 16754.33,11218.22 16758.77,11218.22 ccw(c16758.77,11223.22) 16761.12,11218.81 16763.4,11220.02 ccw(c16756.18,11233.59) 16767.04,11222.71 16784.71,11240.38 cw(c16788.23,11236.83) 16788.23,11241.83 16789.53,11241.83 ccw(c16789.53,11246.83) 16793.05,11243.28 16799.16,11249.39 ccw(c16795.61,11252.91) 16800.61,11252.91 16800.61,11261.5 ccw(c16795.61,11261.5) 16799.17,11265.01 16790.57,11273.61 cw(c16794.12,11277.13) 16789.12,11277.13 16789.12,11308.04 cw(c16794.12,11308.04) 16790.57,11311.56 16889.63,11410.62 cw(c16893.15,11407.07) 16893.15,11412.07 16968.43,11412.07 ccw(c16968.43,11417.07) 16971.95,11413.52 17544.13,11985.7 cw(c17547.65,11982.15) 17547.65,11987.15 18134.22,11987.15 18308.69,12161.62 18308.69,12638.68 H4.1@18340,12670
SD_D1: H4.2 IC1.99 | length 2837.4
  Top Layer 1 w5: v1(16756.18,11233.59) 16755.33,11232.74 16755.33,11212.74 16752.78,11210.19 16752.78,11197.45 16755.33,11194.9 16755.33,11108.81 16801.72,11062.42 16831.5,11062.42 16837.78,11056.14 IC1.99@16860.91,11056.14
  Unused w5: v1(16756.18,11233.59) 16768.41,11245.82 ccw(c16764.86,11249.34) 16769.86,11249.34 16769.86,11302.93 cw(c16774.86,11302.93) 16771.31,11306.45 16894.2,11429.33 cw(c16897.72,11425.78) 16897.72,11430.78 16970.78,11430.78 ccw(c16970.78,11435.78) 16974.3,11432.23 17537.77,11995.7 cw(c17541.29,11992.15) 17541.29,11997.15 18130.08,11997.15 18298.69,12165.76 18298.69,12728.68 H4.2@18340,12770
SD_D2: H4.3 IC1.111 | length 2714.9
  Top Layer 1 w5: IC1.111@16743.27,11311.57 16743.27,11270.42 v1(16754.4,11259.28)
  Unused w5: v1(16754.4,11259.28) 16754.4,11301.61 cw(c16759.4,11301.61) 16755.85,11305.13 16890.49,11439.76 cw(c16894.01,11436.21) 16894.01,11441.21 16967.07,11441.21 ccw(c16967.07,11446.21) 16970.59,11442.66 17533.63,12005.7 cw(c17537.15,12002.15) 17537.15,12007.15 18125.94,12007.15 18288.69,12169.91 18288.69,12818.68 H4.3@18340,12870
SD_D3: H4.4 IC1.112 | length 2819.2
  Top Layer 1 w5: IC1.112@16723.58,11311.57 16724.41,11310.75 16724.41,11263.03 v1(16725.24,11262.2)
  Unused w5: v1(16725.24,11262.2) 16725.24,11290.01 cw(c16730.24,11290.01) 16726.68,11293.53 16885.34,11452.19 cw(c16888.86,11448.64) 16888.86,11453.64 16965.35,11453.64 ccw(c16965.35,11458.64) 16968.87,11455.09 17529.49,12015.7 cw(c17533.01,12012.15) 17533.01,12017.15 18121.8,12017.15 18278.69,12174.05 18278.69,12908.68 H4.4@18340,12970
SD_DETECT: H1.1 IC1.102 | length 3441
  Top Layer 1 w5: v1(16768.15,11203.82) 16768.15,11158.82 16808.15,11118.82 16811.06,11118.82 16813.68,11116.2 16859.9,11116.2 IC1.102@16860.91,11115.2
  Top Layer 1 w10: v1(18339.62,12564.48) 19049.31,12564.48 H1.1@19154.81,12669.99
  Unused w5: v1(16768.15,11203.82) 16776.7,11212.37 cw(c16780.22,11208.82) 16780.22,11213.82 16787.43,11213.82 cw(c16787.43,11208.82) 16790.95,11212.37 16792.73,11210.59 ccw(c16796.23,11214.15) 16796.23,11209.15 16804.83,11209.15 ccw(c16804.83,11214.15) 16808.35,11210.6 16814.46,11216.71 ccw(c16810.91,11220.23) 16815.91,11220.23 16815.91,11228.82 ccw(c16810.91,11228.82) 16814.62,11232.18 16814.44,11232.37 cw(c16818.15,11235.72) 16813.15,11235.72 16813.15,11317.93 cw(c16818.15,11317.93) 16814.6,11321.45 16891.7,11398.55 cw(c16895.22,11395) 16895.22,11400 16973.43,11400 ccw(c16973.43,11405) 16976.95,11401.45 17551.2,11975.7 cw(c17554.72,11972.15) 17554.72,11977.15 18138.36,11977.15 18339.62,12178.41 v1(18339.62,12564.48)
SDCKE_0_6: IC1.29 U1.37 | length 2696.1
  Top Layer 1 w5: IC1.29@16015.39,10682.13 v1@16094.14,10682.1 ; U1.37@16302.17,9775.59 v1@16302.17,9837.43 ; U1.37@16302.41,9775.83 v1(16302.41,9837.68) ; U1.37@16302.66,9775.59 v1@16302.66,9837.43
  Layer 3 w5: 16049.82,9678.13 16018.42,9678.24 ; 16049.85,9678.13 16284.68,9677.96 ; v1(16094.16,10682.08) 16094.16,10643.82 16094.13,10575.75 ; 16284.67,9677.96 ccw(c16284.68,9682.96) 16288.16,9679.38 ; 16288.19,9679.4 16318.15,9709.36 16318.15,9819.87 ; v1(16302.41,9837.68) 16316.69,9823.35 cw(c16313.15,9819.82) 16318.15,9819.91 ; 15981.72,10459.23 cw(c15986.72,10459.2) 15983.14,10462.69 ; 15981.72,10459.23 cw(c15986.72,10459.2) 15983.14,10462.68 ; 15981.72,10459.23 cw(c15986.72,10459.2) 15983.14,10462.68 ; 15981.72,10459.23 cw(c15986.72,10459.2) 15983.14,10462.68 ; 15981.72,10459.23 cw(c15986.72,10459.2) 15983.14,10462.68 ; 15981.72,10459.23 cw(c15986.72,10459.2) 15983.14,10462.68 ; 15981.72,10459.23 cw(c15986.72,10459.2) 15983.14,10462.68 ; 15981.72,10459.23 cw(c15986.72,10459.2) 15983.14,10462.68 ; 15981.72,10459.23 cw(c15986.72,10459.2) 15983.14,10462.68 ; 15981.72,10459.23 cw(c15986.72,10459.2) 15983.14,10462.68 ; 15981.72,10459.23 cw(c15986.72,10459.2) 15983.14,10462.68 ; 15981.72,10459.23 cw(c15986.72,10459.2) 15983.14,10462.68 ; 15981.72,10459.23 cw(c15986.72,10459.2) 15983.14,10462.68 ; 15981.72,10459.23 cw(c15986.72,10459.2) 15983.14,10462.68 ; 15981.72,10459.23 cw(c15986.72,10459.2) 15983.14,10462.68 ; 15981.72,10459.23 cw(c15986.72,10459.2) 15983.14,10462.68 ; 15981.72,10459.23 15981.7,10454.58 ccw(c15996.7,10454.49) 15981.7,10454.49 15981.7,10450.32 15983.2,9713.54 ; 15983.16,10462.71 16092.7,10572.24 ; 15983.2,9713.55 ccw(c16018.57,9713.62) 16018.42,9678.24 ; 15983.2,9713.55 ccw(c16018.57,9713.62) 16018.42,9678.24 ; 15983.2,9713.55 ccw(c16018.57,9713.62) 16018.42,9678.24 ; 15983.2,9713.55 ccw(c16018.57,9713.62) 16018.42,9678.24 ; 15983.2,9713.55 ccw(c16018.57,9713.62) 16018.42,9678.24 ; 15983.2,9713.55 ccw(c16018.57,9713.62) 16018.42,9678.24 ; 15983.2,9713.55 ccw(c16018.57,9713.62) 16018.42,9678.24 ; 15983.2,9713.55 ccw(c16018.57,9713.62) 16018.42,9678.24 ; 15983.2,9713.55 ccw(c16018.57,9713.62) 16018.42,9678.24 ; 15983.2,9713.55 ccw(c16018.57,9713.62) 16018.42,9678.24 ; 15983.2,9713.55 ccw(c16018.57,9713.62) 16018.42,9678.24 ; 15983.2,9713.55 ccw(c16018.57,9713.62) 16018.42,9678.24 ; 15983.2,9713.55 ccw(c16018.57,9713.62) 16018.42,9678.24 ; 15983.2,9713.55 ccw(c16018.57,9713.62) 16018.42,9678.24 ; 15983.2,9713.55 ccw(c16018.57,9713.62) 16018.42,9678.24 ; 15983.2,9713.55 ccw(c16018.57,9713.62) 16018.42,9678.24 ; 16092.72,10572.27 ccw(c16089.13,10575.75) 16094.13,10575.75 ; 16092.72,10572.27 ccw(c16089.13,10575.75) 16094.13,10575.75 ; 16092.72,10572.27 ccw(c16089.13,10575.75) 16094.13,10575.75 ; 16092.72,10572.27 ccw(c16089.13,10575.75) 16094.13,10575.75 ; 16092.72,10572.27 ccw(c16089.13,10575.75) 16094.13,10575.75 ; 16092.72,10572.27 ccw(c16089.13,10575.75) 16094.13,10575.75 ; 16092.72,10572.27 ccw(c16089.13,10575.75) 16094.13,10575.75 ; 16092.72,10572.27 ccw(c16089.13,10575.75) 16094.13,10575.75
SDCKE_1_6: IC1.135 U2.37 | length 4722.9
  Top Layer 1 w5: v1(16270.57,11246.07) 16270.7,11246.2 16270.7,11311.45 IC1.135@16270.83,11311.57
  Layer 3 w5: 15993.16,10458.03 16108.07,10572.94 ; 16108.57,11136.34 16072.48,11104.85 ; 16108.58,11136.34 16131.89,11156.63 cw(c16148.55,11137.5) 16143.19,11162.3 16199.56,11174.48 ; 16109.53,10682.18 cw(c16094.16,10682.09) 16109.53,10681.99 ; 16268.26,9689.59 16285.8,9707.13 16285.8,9814.04 ; v1(16270.57,11246.07) 16250.25,11242.36 ccw(c16253.01,11227.24) 16238.61,11232.6 16225.24,11196.71 ; 16276.06,9827.93 ccw(c16281.06,9827.93) 16277.51,9824.4 ; v1(16301.92,10298.31) 16285.8,10282.18 16285.8,10052.46 16276.06,10042.72 16276.06,9827.92 ; 15991.7,10450.32 cw(c16001.7,10450.34) 15991.7,10450.45 ; 15991.7,10450.32 cw(c16001.7,10450.34) 15991.7,10450.45 ; 15991.7,10450.32 cw(c16001.7,10450.34) 15991.7,10450.45 ; 15991.7,10450.32 cw(c16001.7,10450.34) 15991.7,10450.45 ; 15991.7,10450.32 cw(c16001.7,10450.34) 15991.7,10450.45 ; 15991.7,10450.32 cw(c16001.7,10450.34) 15991.7,10450.45 ; 15991.7,10450.32 cw(c16001.7,10450.34) 15991.7,10450.45 ; 15991.7,10450.32 cw(c16001.7,10450.34) 15991.7,10450.45 ; 15991.7,10450.32 15993.2,9713.56 ; 15991.7,10450.45 15991.72,10454.56 ; 15991.72,10454.56 cw(c15996.72,10454.52) 15993.14,10458.01 ; 15991.72,10454.56 cw(c15996.72,10454.52) 15993.14,10458 ; 15991.72,10454.56 cw(c15996.72,10454.52) 15993.14,10458 ; 15991.72,10454.56 cw(c15996.72,10454.52) 15993.14,10458 ; 15991.72,10454.56 cw(c15996.72,10454.52) 15993.14,10458 ; 15991.72,10454.56 cw(c15996.72,10454.52) 15993.14,10458 ; 15991.72,10454.56 cw(c15996.72,10454.52) 15993.14,10458 ; 15991.72,10454.56 cw(c15996.72,10454.52) 15993.14,10458 ; 15991.72,10454.56 cw(c15996.72,10454.52) 15993.14,10458 ; 15991.72,10454.56 cw(c15996.72,10454.52) 15993.14,10458 ; 15991.72,10454.56 cw(c15996.72,10454.52) 15993.14,10458 ; 15991.72,10454.56 cw(c15996.72,10454.52) 15993.14,10458 ; 15991.72,10454.56 cw(c15996.72,10454.52) 15993.14,10458 ; 15991.72,10454.56 cw(c15996.72,10454.52) 15993.14,10458 ; 15991.72,10454.56 cw(c15996.72,10454.52) 15993.14,10458 ; 15991.72,10454.56 cw(c15996.72,10454.52) 15993.14,10458 ; 15993.2,9713.57 ccw(c16018.57,9713.62) 16018.47,9688.24 ; 15993.2,9713.57 ccw(c16018.57,9713.62) 16018.47,9688.24 ; 15993.2,9713.57 ccw(c16018.57,9713.62) 16018.47,9688.24 ; 15993.2,9713.57 ccw(c16018.57,9713.62) 16018.47,9688.24 ; 15993.2,9713.57 ccw(c16018.57,9713.62) 16018.47,9688.24 ; 15993.2,9713.57 ccw(c16018.57,9713.62) 16018.47,9688.24 ; 15993.2,9713.57 ccw(c16018.57,9713.62) 16018.47,9688.24 ; 15993.2,9713.57 ccw(c16018.57,9713.62) 16018.47,9688.24 ; 15993.2,9713.57 ccw(c16018.57,9713.62) 16018.47,9688.24 ; 15993.2,9713.57 ccw(c16018.57,9713.62) 16018.47,9688.24 ; 15993.2,9713.57 ccw(c16018.57,9713.62) 16018.47,9688.24 ; 15993.2,9713.57 ccw(c16018.57,9713.62) 16018.47,9688.24 ; 15993.2,9713.57 ccw(c16018.57,9713.62) 16018.47,9688.24 ; 15993.2,9713.57 ccw(c16018.57,9713.62) 16018.47,9688.24 ; 15993.2,9713.57 ccw(c16018.57,9713.62) 16018.47,9688.24 ; 15993.2,9713.57 ccw(c16018.57,9713.62) 16018.47,9688.24 ; 16018.47,9688.24 16049.88,9688.13 16252.99,9688.13 16264.76,9688.16 ; 16053.89,10980.39 ccw(c16079.21,10978.64) 16058.42,10964.09 ; 16053.89,10980.39 ccw(c16079.21,10978.64) 16058.42,10964.09 ; 16053.89,10980.39 ccw(c16079.21,10978.64) 16058.42,10964.09 ; 16053.89,10980.39 ccw(c16079.21,10978.64) 16058.42,10964.09 ; 16053.89,10980.39 ccw(c16079.21,10978.64) 16058.42,10964.09 ; 16053.89,10980.39 ccw(c16079.21,10978.64) 16058.42,10964.09 ; 16053.89,10980.39 ccw(c16079.21,10978.64) 16058.42,10964.09 ; 16053.89,10980.39 ccw(c16079.21,10978.64) 16058.42,10964.09 ; 16053.89,10980.39 ccw(c16079.21,10978.64) 16058.42,10964.09 ; 16053.89,10980.39 ccw(c16079.21,10978.64) 16058.42,10964.09 ; 16053.89,10980.39 ccw(c16079.21,10978.64) 16058.42,10964.09 ; 16053.89,10980.39 ccw(c16079.21,10978.64) 16058.42,10964.09 ; 16053.89,10980.39 ccw(c16079.21,10978.64) 16058.42,10964.09 ; 16053.89,10980.39 ccw(c16079.21,10978.64) 16058.42,10964.09 ; 16053.89,10980.39 ccw(c16079.21,10978.64) 16058.42,10964.09 ; 16053.89,10980.39 ccw(c16079.21,10978.64) 16058.42,10964.09 ; 16053.89,10980.39 16058.06,11040.51 cw(c16093.35,11038.08) 16058.24,11042.42 16063.98,11088.82 ; 16058.42,10964.09 16107.6,10893.68 ccw(c16111.72,10896.51) 16108.11,10893.05 cw(c16104.49,10889.6) 16109.49,10889.6 16109.54,10682.17 ; 16063.98,11088.82 cw(c16089.16,11085.73) 16072.48,11104.85 ; 16063.98,11088.82 cw(c16089.16,11085.73) 16072.48,11104.85 ; 16063.98,11088.82 cw(c16089.16,11085.73) 16072.48,11104.85 ; 16063.98,11088.82 cw(c16089.16,11085.73) 16072.48,11104.85 ; 16063.98,11088.82 cw(c16089.16,11085.73) 16072.48,11104.85 ; 16063.98,11088.82 cw(c16089.16,11085.73) 16072.48,11104.85 ; 16063.98,11088.82 cw(c16089.16,11085.73) 16072.48,11104.85 ; 16063.98,11088.82 cw(c16089.16,11085.73) 16072.48,11104.85 ; 16063.98,11088.82 cw(c16089.16,11085.73) 16072.48,11104.85 ; 16063.98,11088.82 cw(c16089.16,11085.73) 16072.48,11104.85 ; 16063.98,11088.82 cw(c16089.16,11085.73) 16072.48,11104.85 ; 16063.98,11088.82 cw(c16089.16,11085.73) 16072.48,11104.85 ; 16063.98,11088.82 cw(c16089.16,11085.73) 16072.48,11104.85 ; 16063.98,11088.82 cw(c16089.16,11085.73) 16072.48,11104.85 ; 16063.98,11088.82 cw(c16089.16,11085.73) 16072.48,11104.85 ; 16063.98,11088.82 cw(c16089.16,11085.73) 16072.48,11104.85 ; 16108.1,10572.97 ccw(c16104.5,10576.44) 16109.5,10576.44 ; 16108.1,10572.97 ccw(c16104.5,10576.44) 16109.5,10576.44 ; 16108.1,10572.97 ccw(c16104.5,10576.44) 16109.5,10576.44 ; 16108.1,10572.97 ccw(c16104.5,10576.44) 16109.5,10576.44 ; 16108.1,10572.97 ccw(c16104.5,10576.44) 16109.5,10576.44 ; 16108.1,10572.97 ccw(c16104.5,10576.44) 16109.5,10576.44 ; 16108.1,10572.97 ccw(c16104.5,10576.44) 16109.5,10576.44 ; 16108.1,10572.97 ccw(c16104.5,10576.44) 16109.5,10576.44 ; 16108.1,10572.97 ccw(c16104.5,10576.44) 16109.5,10576.44 ; 16108.1,10572.97 ccw(c16104.5,10576.44) 16109.5,10576.44 ; 16108.1,10572.97 ccw(c16104.5,10576.44) 16109.5,10576.44 ; 16108.1,10572.97 ccw(c16104.5,10576.44) 16109.5,10576.44 ; 16108.1,10572.97 ccw(c16104.5,10576.44) 16109.5,10576.44 ; 16108.1,10572.97 ccw(c16104.5,10576.44) 16109.5,10576.44 ; 16108.1,10572.97 ccw(c16104.5,10576.44) 16109.5,10576.44 ; 16108.1,10572.97 ccw(c16104.5,10576.44) 16109.5,10576.44 ; 16109.5,10576.44 16109.54,10681.99 ; 16109.53,10681.99 ccw(c16094.16,10682.09) 16109.53,10682.17 ; 16109.53,10681.99 ccw(c16094.16,10682.09) 16109.53,10682.17 ; 16109.53,10681.99 ccw(c16094.16,10682.09) 16109.53,10682.17 ; 16109.53,10681.99 ccw(c16094.16,10682.09) 16109.53,10682.17 ; 16109.53,10681.99 ccw(c16094.16,10682.09) 16109.53,10682.17 ; 16109.53,10681.99 ccw(c16094.16,10682.09) 16109.53,10682.17 ; 16109.53,10681.99 ccw(c16094.16,10682.09) 16109.53,10682.17 ; 16109.53,10681.99 ccw(c16094.16,10682.09) 16109.53,10682.17 ; 16109.53,10681.99 ccw(c16094.16,10682.09) 16109.53,10682.17 ; 16109.53,10681.99 ccw(c16094.16,10682.09) 16109.53,10682.17 ; 16109.53,10681.99 ccw(c16094.16,10682.09) 16109.53,10682.17 ; 16109.53,10681.99 ccw(c16094.16,10682.09) 16109.53,10682.17 ; 16109.53,10681.99 ccw(c16094.16,10682.09) 16109.53,10682.17 ; 16109.53,10681.99 ccw(c16094.16,10682.09) 16109.53,10682.17 ; 16109.53,10681.99 ccw(c16094.16,10682.09) 16109.53,10682.17 ; 16199.56,11174.48 ccw(c16192.09,11209.06) 16225.24,11196.71 ; 16199.56,11174.48 ccw(c16192.09,11209.06) 16225.24,11196.71 ; 16199.56,11174.48 ccw(c16192.09,11209.06) 16225.24,11196.71 ; 16199.56,11174.48 ccw(c16192.09,11209.06) 16225.24,11196.71 ; 16199.56,11174.48 ccw(c16192.09,11209.06) 16225.24,11196.71 ; 16199.56,11174.48 ccw(c16192.09,11209.06) 16225.24,11196.71 ; 16199.56,11174.48 ccw(c16192.09,11209.06) 16225.24,11196.71 ; 16199.56,11174.48 ccw(c16192.09,11209.06) 16225.24,11196.71 ; 16199.56,11174.48 ccw(c16192.09,11209.06) 16225.24,11196.71 ; 16199.56,11174.48 ccw(c16192.09,11209.06) 16225.24,11196.71 ; 16199.56,11174.48 ccw(c16192.09,11209.06) 16225.24,11196.71 ; 16199.56,11174.48 ccw(c16192.09,11209.06) 16225.24,11196.71 ; 16199.56,11174.48 ccw(c16192.09,11209.06) 16225.24,11196.71 ; 16199.56,11174.48 ccw(c16192.09,11209.06) 16225.24,11196.71 ; 16199.56,11174.48 ccw(c16192.09,11209.06) 16225.24,11196.71 ; 16199.56,11174.48 ccw(c16192.09,11209.06) 16225.24,11196.71 ; 16264.76,9688.16 ccw(c16264.75,9693.16) 16268.23,9689.57 ; 16264.76,9688.16 ccw(c16264.75,9693.16) 16268.23,9689.57 ; 16264.76,9688.16 ccw(c16264.75,9693.16) 16268.23,9689.57 ; 16264.76,9688.16 ccw(c16264.75,9693.16) 16268.23,9689.57 ; 16264.76,9688.16 ccw(c16264.75,9693.16) 16268.23,9689.57 ; 16264.76,9688.16 ccw(c16264.75,9693.16) 16268.23,9689.57 ; 16264.76,9688.16 ccw(c16264.75,9693.16) 16268.23,9689.57 ; 16264.76,9688.16 ccw(c16264.75,9693.16) 16268.23,9689.57 ; 16264.76,9688.16 ccw(c16264.75,9693.16) 16268.23,9689.57 ; 16264.76,9688.16 ccw(c16264.75,9693.16) 16268.23,9689.57 ; 16264.76,9688.16 ccw(c16264.75,9693.16) 16268.23,9689.57 ; 16264.76,9688.16 ccw(c16264.75,9693.16) 16268.23,9689.57 ; 16264.76,9688.16 ccw(c16264.75,9693.16) 16268.23,9689.57 ; 16264.76,9688.16 ccw(c16264.75,9693.16) 16268.23,9689.57 ; 16264.76,9688.16 ccw(c16264.75,9693.16) 16268.23,9689.57 ; 16264.76,9688.16 ccw(c16264.75,9693.16) 16268.23,9689.57 ; 16276.06,9827.92 ccw(c16281.06,9827.93) 16277.51,9824.4 ; 16276.06,9827.92 ccw(c16281.06,9827.93) 16277.51,9824.4 ; 16276.06,9827.92 ccw(c16281.06,9827.93) 16277.51,9824.4 ; 16276.06,9827.92 ccw(c16281.06,9827.93) 16277.51,9824.4 ; 16276.06,9827.92 ccw(c16281.06,9827.93) 16277.51,9824.4 ; 16276.06,9827.92 ccw(c16281.06,9827.93) 16277.51,9824.4 ; 16276.06,9827.92 ccw(c16281.06,9827.93) 16277.51,9824.4 ; 16276.06,9827.92 ccw(c16281.06,9827.93) 16277.51,9824.4 ; 16276.06,9827.92 ccw(c16281.06,9827.93) 16277.51,9824.4 ; 16276.06,9827.92 ccw(c16281.06,9827.93) 16277.51,9824.4 ; 16276.06,9827.92 ccw(c16281.06,9827.93) 16277.51,9824.4 ; 16276.06,9827.92 ccw(c16281.06,9827.93) 16277.51,9824.4 ; 16276.06,9827.92 ccw(c16281.06,9827.93) 16277.51,9824.4 ; 16276.06,9827.92 ccw(c16281.06,9827.93) 16277.51,9824.4 ; 16276.06,9827.92 ccw(c16281.06,9827.93) 16277.51,9824.4 ; 16277.51,9824.4 16284.35,9817.52 ; 16284.35,9817.52 cw(c16280.8,9814) 16285.8,9814.09 ; 16284.35,9817.52 cw(c16280.8,9814) 16285.8,9814.09 ; 16284.35,9817.52 cw(c16280.8,9814) 16285.8,9814.09 ; 16284.35,9817.52 cw(c16280.8,9814) 16285.8,9814.09 ; 16284.35,9817.52 cw(c16280.8,9814) 16285.8,9814.09 ; 16284.35,9817.52 cw(c16280.8,9814) 16285.8,9814.09 ; 16284.35,9817.52 cw(c16280.8,9814) 16285.8,9814.09 ; 16284.35,9817.52 cw(c16280.8,9814) 16285.8,9814.09 ; 16284.35,9817.52 cw(c16280.8,9814) 16285.8,9814.09 ; 16284.35,9817.52 cw(c16280.8,9814) 16285.8,9814.09 ; 16284.35,9817.52 cw(c16280.8,9814) 16285.8,9814.09 ; 16284.35,9817.52 cw(c16280.8,9814) 16285.8,9814.09 ; 16284.35,9817.52 cw(c16280.8,9814) 16285.8,9814.09 ; 16284.35,9817.52 cw(c16280.8,9814) 16285.8,9814.09 ; 16284.35,9817.52 cw(c16280.8,9814) 16285.8,9814.09 ; 16284.35,9817.52 cw(c16280.8,9814) 16285.8,9814.09
  Bottom 6+gnd w5: U2.37@16302.17,10236.22 v1@16302.17,10298.06
SDCKE_01_7: IC2.29 U3.37 | length 1647.9
  Top Layer 1 w5: IC2.29@14707.11,10677.92 v1@14785.84,10677.92 ; U3.37@14993.87,9771.4 v1@14993.87,9833.24
  Layer 3 w5: 14673.4,10445.04 14673.4,10447.12 cw(c14678.4,10447.09) 14673.51,10448.17 14674.01,10450.43 cw(c14698.42,10445.04) 14680.75,10462.72 14721.9,10503.84 cw(c14746.65,10479.09) 14723.76,10505.57 14775.77,10550.55 ccw(c14765.72,10562.18) 14781.08,10561.54 v1(14785.86,10677.89) ; 14674.9,10443.52 14674.9,9709.36 ccw(c14710.27,9709.43) 14710.33,9674.05 14741.44,9674.05 14741.56,9673.94 ; 14741.59,9673.94 14867.7,9673.94 ; 14867.73,9673.94 14930.72,9674.1 ccw(c14930.63,9709.47) 14941.66,9675.86 14970.06,9685.21 ; 14971.21,9685.62 14999.13,9696.33 ccw(c14993.62,9710.69) 15004.57,9699.89 15007.55,9702.91 ; v1(14994.11,9833.49) 15008.99,9818.6 15008.99,9704.36 15007.57,9702.94
SDCKE_11_7: IC2.135 U4.37 | length 2788.7
  Top Layer 1 w5: IC2.135@14962.53,11307.38 14962.83,11307.08 14962.83,11252.37 v1(14963.14,11252.06)
  Layer 3 w5: 14729.85,11096.08 14729.85,11090.84 ccw(c14744.85,11090.76) 14729.85,11090.76 14729.85,10971.7 ccw(c14744.85,10971.71) 14732.36,10963.4 14798.6,10863.86 cw(c14785.86,10855.26) 14801.24,10855.26 14801.24,10815.26 14801.24,10677.9 cw(c14785.86,10677.9) 14801.19,10676.74 14801.19,10676.67 cw(c14785.86,10677.89) 14801.18,10676.56 14790.99,10559.97 cw(c14765.72,10562.18) 14782.31,10542.98 14730.31,10498.01 ccw(c14746.65,10479.09) 14728.98,10496.78 14687.82,10455.65 ccw(c14698.42,10445.04) 14683.42,10445.01 14684.62,10443.82 cw(c14674.9,10441.47) 14684.9,10441.47 14684.9,9709.38 ccw(c14710.27,9709.43) 14710.36,9684.05 14741.47,9684.05 14741.58,9683.94 ccw(c14741.65,9709.31) 14741.65,9683.94 14867.67,9683.94 14930.73,9684.1 ccw(c14930.63,9709.47) 14938.56,9685.37 14966.9,9694.7 ccw(c14962.12,9709.31) 14977.5,9709.38 14977.45,9767.94 ccw(c14972.45,9767.94) 14976.08,9771.38 14976.03,9771.43 14964.85,9782.61 14964.85,9849.63 14977.5,9862.28 14977.5,10182.28 14978.94,10183.72 14992.16,10196.98 ccw(c14988.62,10200.52) 14993.62,10200.43 v1(14993.62,10294.12) ; 14729.88,11096.11 cw(c14734.88,11096.08) 14730.06,11097.41 14806.36,11173.71 14844.12,11173.71 14920.41,11250.01 14961.08,11250.01 v1(14963.14,11252.06)
  Bottom 6+gnd w5: U4.37@14993.87,10232.03 v1@14993.87,10293.87